# Altium PCB motor_dev_pcb.PcbDoc (part 2 of 2)
Units mm, origin at the board's own origin, x right, y up, seen from the top; angles counter-clockwise.
Board outline 133.34 x 70 mm, 2 copper layers (Top Layer, Bottom Layer); 214 components, 218 nets, 1073 pads, 147 vias.
Unrouted connection lines stored in the file: 690.
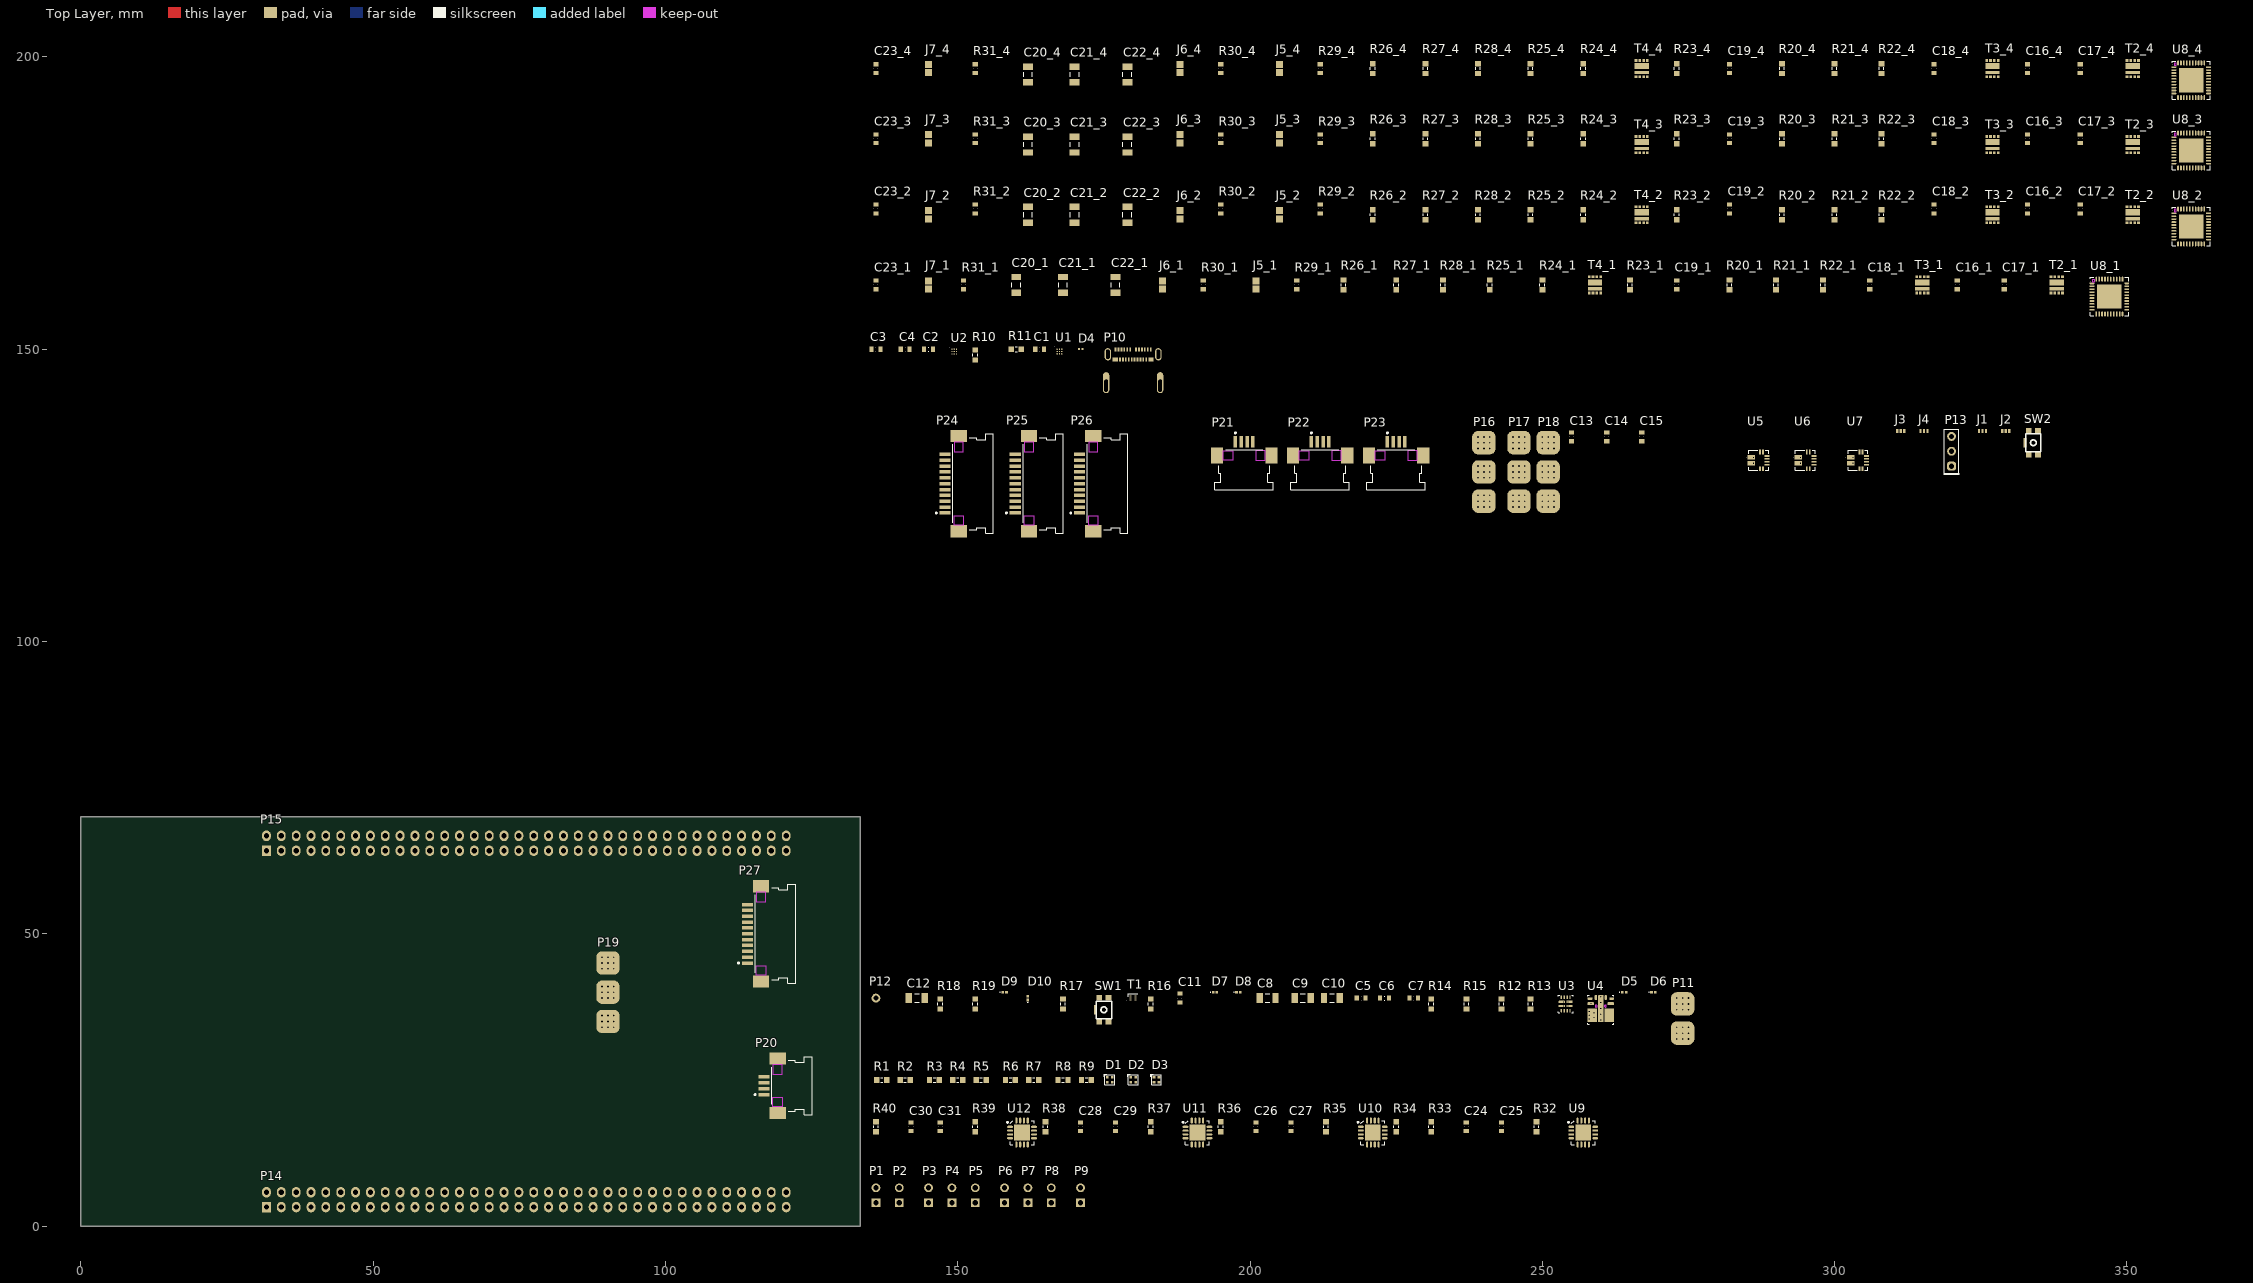
[diagram p0: Top Layer view]

## Via types
v1: diameter 0.5, hole 0.3, Top Layer to Bottom Layer, 126 vias
v2: diameter 0.5, hole 0.2, Top Layer to Bottom Layer, tented both sides, 11 vias
v3: diameter 0.4, hole 0.2, Top Layer to Bottom Layer, tented both sides, 10 vias

## Nets (pads, with @x,y where several pads share a name; then routed paths per layer and width w, separated by ;. In a path a pad name is that pad's centre, name@x,y a point inside that pad or via, vN(x,y) a via of type N, cw(c..) or ccw(c..) an arc to the next point about the centre after c; other vN are vias at no path point) (continued)
NetC19_4_1: C19_4.1 U8_4.33
NetC24_1: C24.1 R32.2 U9.12
NetC26_1: C26.1 R35.2 U10.12
NetC28_1: C28.1 R37.2 U11.12
NetC30_1: C30.1 R39.2 U12.12
NetD1_2: D1.2 R1.2
NetD1_3: D1.3 R3.2
NetD1_4: D1.4 R2.2
NetD2_2: D2.2 R4.2
NetD2_3: D2.3 R6.2
NetD2_4: D2.4 R5.2
NetD3_2: D3.2 R7.2
NetD3_3: D3.3 R9.2
NetD3_4: D3.4 R8.2
NetD5_1: D5.1 D6.1 R12.1
NetD7_1: D7.1 D8.1 SW1.2
NetD8_2: D8.2 D9.1 R12.2 T1.3 T1.6 U3.4 U3.5
NetD10_1: D10.1 R13.2 U3.6
NetJ5_1_1: J5_1.1 U8_1.19
NetJ5_1_2: J5_1.2 R29_1.1 T2_1.5 T2_1.6 T2_1.7
NetJ5_2_1: J5_2.1 U8_2.19
NetJ5_2_2: J5_2.2 R29_2.1 T2_2.5 T2_2.6 T2_2.7
NetJ5_3_1: J5_3.1 U8_3.19
NetJ5_3_2: J5_3.2 R29_3.1 T2_3.5 T2_3.6 T2_3.7
NetJ5_4_1: J5_4.1 U8_4.19
NetJ5_4_2: J5_4.2 R29_4.1 T2_4.5 T2_4.6 T2_4.7
NetJ6_1_1: J6_1.1 U8_1.12
NetJ6_1_2: J6_1.2 R30_1.1 T3_1.5 T3_1.6 T3_1.7
NetJ6_2_1: J6_2.1 U8_2.12
NetJ6_2_2: J6_2.2 R30_2.1 T3_2.5 T3_2.6 T3_2.7
NetJ6_3_1: J6_3.1 U8_3.12
NetJ6_3_2: J6_3.2 R30_3.1 T3_3.5 T3_3.6 T3_3.7
NetJ6_4_1: J6_4.1 U8_4.12
NetJ6_4_2: J6_4.2 R30_4.1 T3_4.5 T3_4.6 T3_4.7
NetJ7_1_1: J7_1.1 U8_1.9
NetJ7_1_2: J7_1.2 R31_1.1 T4_1.5 T4_1.6 T4_1.7
NetJ7_2_1: J7_2.1 U8_2.9
NetJ7_2_2: J7_2.2 R31_2.1 T4_2.5 T4_2.6 T4_2.7
NetJ7_3_1: J7_3.1 U8_3.9
NetJ7_3_2: J7_3.2 R31_3.1 T4_3.5 T4_3.6 T4_3.7
NetJ7_4_1: J7_4.1 U8_4.9
NetJ7_4_2: J7_4.2 R31_4.1 T4_4.5 T4_4.6 T4_4.7
NetR33_2: R33.2 U9.2 U10.1
NetR36_2: R36.2 U10.2 U11.1
NetR38_2: R38.2 U11.2 U12.1
NetT2_1_1: T2_1.1 U8_1.6
NetT2_1_8: T2_1.8 U8_1.8
NetT2_2_1: T2_2.1 U8_2.6
NetT2_2_8: T2_2.8 U8_2.8
NetT2_3_1: T2_3.1 U8_3.6
NetT2_3_8: T2_3.8 U8_3.8
NetT2_4_1: T2_4.1 U8_4.6
NetT2_4_8: T2_4.8 U8_4.8
NetT3_1_1: T3_1.1 U8_1.15
NetT3_1_8: T3_1.8 U8_1.13
NetT3_2_1: T3_2.1 U8_2.15
NetT3_2_8: T3_2.8 U8_2.13
NetT3_3_1: T3_3.1 U8_3.15
NetT3_3_8: T3_3.8 U8_3.13
NetT3_4_1: T3_4.1 U8_4.15
NetT3_4_8: T3_4.8 U8_4.13
NetT4_1_1: T4_1.1 U8_1.16
NetT4_1_8: T4_1.8 U8_1.18
NetT4_2_1: T4_2.1 U8_2.16
NetT4_2_8: T4_2.8 U8_2.18
NetT4_3_1: T4_3.1 U8_3.16
NetT4_3_8: T4_3.8 U8_3.18
NetT4_4_1: T4_4.1 U8_4.16
NetT4_4_8: T4_4.8 U8_4.18
NetU9_10: U9.10 U10.15
NetU10_10: U10.10 U11.15
NetU11_10: U11.10 U12.15
Neutral_m1_5: J1.3 P20.4
Neutral_m2_5: J2.3 P21.4
Neutral_m3_5: J3.3 P22.4
Neutral_m4_5: J4.3 P23.4
PA3_5: J1.2 P15.37
PA4_5: P14.32 U7.11
PA5_5: P15.11 U6.11
PA6_5: P15.13 U5.11
PA13_5: P14.13
PA14_5: P14.15
PC1_5: J3.2 P14.36
PE5_5: P13.1 P14.50
PE6_5: P13.3 P14.62
PF5_5: J4.2 P15.36
PF9_5: J2.2 P14.56
Ph1_m1_5: P19.1 P20.1 P27.6 P27.7 U7.3 U7.4
  other v1: 89.16,34 90.16,34 91.16,34 89.16,35 90.16,35 91.16,35 89.16,36 90.16,36 91.16,36
  other v3: 303.15,130.5
Ph2_m1_5: P19.2 P20.2 P27.8 P27.9 U6.3 U6.4
  other v1: 89.16,39 90.16,39 91.16,39 89.16,40 90.16,40 91.16,40 89.16,41 90.16,41 91.16,41
  other v3: 294.15,130.5
Ph3_m1_5: P19.3 P20.3 P27.10 P27.11 U5.3 U5.4
  other v1: 89.16,44 90.16,44 91.16,44 89.16,45 90.16,45 91.16,45 89.16,46 90.16,46 91.16,46
  other v3: 286.15,130.5
PP_STATE_1: P14.66 R14.2 U3.9
PWR_ON_DFU_1: P14.7 R19.1 SW2.1 T1.5
PWR_ON_PRG_1: P14.65 R18.1 T1.2
STATUS1_RGB.B_1: P14.42 R3.1
STATUS1_RGB.G_1: P14.58 R2.1
STATUS1_RGB.R_1: P14.59 R1.1
STATUS2_RGB.B_1: P15.68 R6.1
STATUS2_RGB.G_1: P15.69 R5.1
STATUS2_RGB.R_1: P14.44 R4.1
STATUS3_RGB.B_1: P15.66 R9.1
STATUS3_RGB.G_1: P15.67 R8.1
STATUS3_RGB.R_1: P15.70 R7.1
VBUS_1: D4.1 D6.2 P10.A4 P10.A9 P10.B4 P10.B9 R13.1 U2.A2 U3.7
  other v3: 254.4,37.65
pads on no net: P10.A2 P10.A3 P10.A6 P10.A7 P10.A8 P10.A10 P10.A11 P10.B2 P10.B3 P10.B6 P10.B7 P10.B8 P10.B10 P10.B11 P14.3 P14.4 P14.5 P14.6 P14.10 P14.12 P14.14 P14.18 P14.21 P14.23 P14.24 P14.25 P14.26 P14.27 P14.29 P14.31 P14.33 P14.46 P14.47 P14.48 P14.52 P14.55 P14.57 P14.61 P14.63 P14.64 P14.67 P14.68 P14.69 P15.3 P15.7 P15.8 P15.10 P15.12 P15.14 P15.17 P15.21 P15.22 P15.40 P15.44 P15.48 P15.61 P15.62 P15.64 P24.1 P24.2 P24.3 P24.4 P24.5 P25.1 P25.2 P25.3 P25.4 P25.5 P26.1 P26.2 P26.3 P26.4 P26.5 P27.1 P27.2 P27.3 P27.4 P27.5 SW2.Shield U1.C1 U2.B1 U4.4 U4.5 U4.6 U4.7 U4.9 U4.V U5.6 U5.7 U5.8 U5.9 U5.10 U6.6 U6.7 U6.8 U6.9 U6.10 U7.6 U7.7 U7.8 U7.9 U7.10 U8_1.31 U8_1.32 U8_1.40 U8_2.31 U8_2.32 U8_2.40 U8_3.31 U8_3.32 U8_3.40 U8_4.31 U8_4.32 U8_4.40 U9.5 U9.6 U9.7 U9.8 U9.16 U9.17 U10.5 U10.6 U10.7 U10.8 U10.16 U10.17 U11.5 U11.6 U11.7 U11.8 U11.16 U11.17 U12.5 U12.6 U12.7 U12.8 U12.16 U12.17

## Other copper
Top Layer:
  text ".Project_Name" at 59.125,-29.2 h2.5
  text "EPFL STI-IMT-LSRO1" at 60.5,-31.9 h1.4
  text "13.02.2008 - Rev 1.0 - DBR" at 58.5,-33.15 h1.4

## Silkscreen, mask and mechanical layers (free items; w line width, h text height)
Top Solder:
  text ".Project_Name" at 59.125,-29.2 h2.5
  text "EPFL STI-IMT-LSRO1" at 60.5,-31.9 h1.4
  text "13.02.2008 - Rev 1.0 - DBR" at 58.5,-33.15 h1.4
Outline:
  the board outline again, w0.254

## Dimensions
0,70 to 0,0 on Outline
0,0 to 133.34,0 on Outline